# Altium PCB 2401_Test_Board_V1.1.PCBDOC (part 2 of 2)
Units mm, origin at the board's own origin, x right, y up, seen from the top; angles counter-clockwise.
Board outline 36.53 x 36.61 mm, 2 copper layers (Top Layer, Bottom Layer); 40 components, 34 nets, 129 pads, 21 vias.
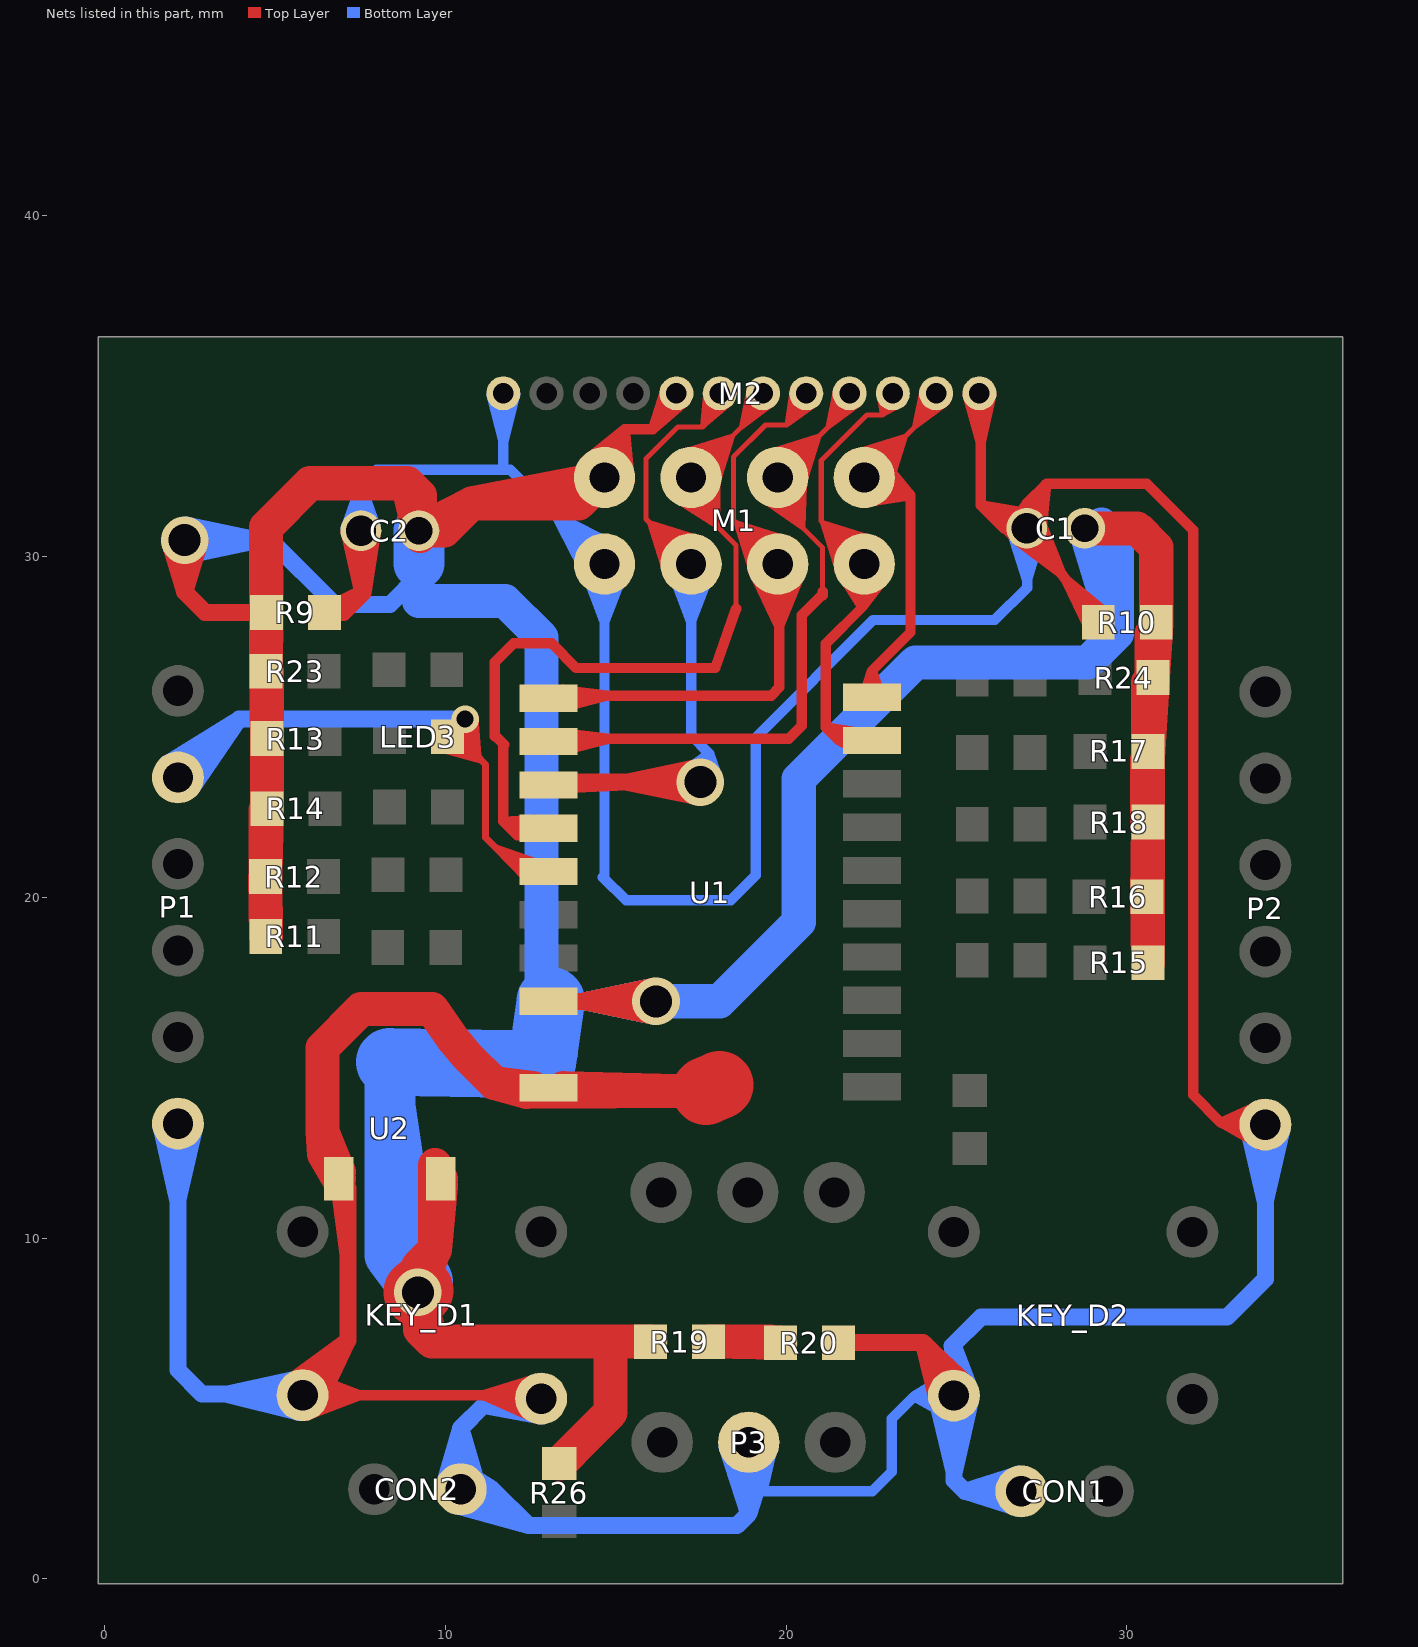
[diagram p2: the nets of this part, all layers, seen from the top]

## Via types
v1: diameter 1.397, hole 0.94, Top Layer to Bottom Layer, 11 vias
v2: diameter 0.8, hole 0.5, Top Layer to Bottom Layer, 10 vias

## Nets (pads, with @x,y where several pads share a name; then routed paths per layer and width w, separated by ;. In a path a pad name is that pad's centre, name@x,y a point inside that pad or via, vN(x,y) a via of type N, cw(c..) or ccw(c..) an arc to the next point about the centre after c; other vN are vias at no path point) (continued)
$$$32: LED3.1 P1.5 U1.15 | length 37.4
  Top Layer w0.2: LED3.1@9.901,24.335 11.07,24.008 ; LED3.1@9.971,24.524 11.07,24.008 ; LED3.1@10.061,24.683 11.07,24.008 ; LED3.1@10.061,24.708 10.071,24.718 10.36,24.718 11.18,23.898 11.18,21.748 12.17,20.758 U1.15@13.02,20.758 ; LED3.1@10.174,24.826 11.07,24.008 ; LED3.1@10.313,25.092 10.963,24.144 ; LED3.1@10.321,24.963 11.07,24.008 ; v2(10.58,25.228) 10.963,24.144 ; v2@10.873,25.29 10.963,24.144 ; U1.15@12.38,20.525 11.453,21.475 ; U1.15@12.57,20.758 11.453,21.475 ; U1.15@12.702,21.027 11.453,21.475
  Top Layer w0.5: LED3.1@10.061,24.708 v2(10.58,25.228) LED3.1@10.061,24.733
  Bottom Layer w0.5: P1.5@1.837,23.923 3.94,25.228 ; P1.5@2.54,23.186 3.94,25.228 ; v2(10.58,25.228) 3.94,25.228 ; 3.94,25.228 P1.5@2.15,23.518 2.23,23.518 3.94,25.228
$$$36: R19.1 R20.2 | length 3.9
  Top Layer w1: R20.2@19.54,6.958 R19.1@17.721,6.958 R20.2@19.829,6.928
CE: M1.3 M2.6 U1.13 | length 67.9
  Top Layer w0.15: M1.3@16.504,29.351 15.992,30.996 ; M1.3@16.648,29.403 15.992,30.996 ; M1.3@16.787,29.468 15.992,30.996 ; M1.3@16.918,29.543 15.992,30.996 ; M1.3@17.041,29.63 15.992,30.996 ; M1.3@17.156,29.726 15.992,30.996 ; M1.3@17.262,29.832 15.992,30.996 ; M1.3@17.358,29.947 15.992,30.996 ; M1.3@17.445,30.07 15.992,30.996 ; M1.3@17.52,30.201 15.992,30.996 ; M1.3@17.585,30.34 15.992,30.996 ; M1.3@17.637,30.484 15.992,30.996 ; M2.6@17.642,34.907 17.54,33.798 ; M2.6@17.792,34.883 17.54,33.798 ; M2.6@17.936,34.839 17.54,33.798 ; M2.6@18.158,34.725 17.54,33.798 ; M2.6@18.277,34.633 17.54,33.798 ; M2.6@18.384,34.525 17.54,33.798 ; 15.992,30.996 M1.3@17.21,29.778 15.89,31.098 15.89,32.868 16.82,33.798 17.54,33.798 ; 17.54,33.798 M2.6@18.05,34.788 18.01,34.748 18.01,34.268 17.54,33.798
  Top Layer w0.5: U1.13@13.02,23.298 13.1,23.378 v1(17.48,23.378) 15.282,23.378 ; U1.13@13.47,23.298 15.373,23.378 ; v1@17.434,22.932 15.282,23.378 ; v1@17.434,23.824 15.282,23.378
  Bottom Layer w0.305: M1.3@16.611,29.667 17.21,28.102 ; M1.3@16.906,29.75 17.21,28.102 ; v1@17.034,23.693 17.74,24.218 ; M1.3@17.21,29.778 17.21,24.748 17.74,24.218 ; v1@17.261,23.48 17.74,24.218 ; M1.3@17.514,29.75 17.21,28.102 ; v1@17.718,23.339 17.74,24.218 ; M1.3@17.809,29.667 17.21,28.102 ; v1@18.026,23.387 17.74,24.218 ; 17.74,24.218 v1(17.48,23.378) 17.56,23.378 17.74,23.558 17.74,24.218
CSN: M1.7 M2.7 U1.14 | length 78.9
  Top Layer w0.15: M1.7@16.604,31.758 17.981,30.877 ; M1.7@16.693,31.884 17.981,30.877 ; M1.7@16.783,33.024 18.428,33.536 ; M1.7@16.793,31.999 17.981,30.877 ; M1.7@16.835,32.88 18.428,33.536 ; M1.7@16.9,32.741 18.428,33.536 ; M1.7@16.902,32.104 17.981,30.877 ; M1.7@16.975,32.61 18.428,33.536 ; M1.7@17.019,32.198 17.981,30.877 ; M1.7@17.062,32.487 18.428,33.536 ; M1.7@17.145,32.281 17.981,30.877 ; M1.7@17.158,32.372 18.428,33.536 ; M1.7@17.264,32.266 18.428,33.536 ; M1.7@17.277,32.352 17.981,30.877 ; M1.7@17.379,32.17 18.428,33.536 ; M1.7@17.415,32.41 17.981,30.877 ; M1.7@17.502,32.083 18.428,33.536 ; M1.7@17.559,32.456 17.981,30.877 ; M1.7@17.633,32.008 18.428,33.536 ; M1.7@17.707,32.488 17.981,30.877 ; M1.7@17.772,31.943 18.428,33.536 ; M1.7@17.858,32.507 17.981,30.877 ; M1.7@17.916,31.891 18.428,33.536 ; M1.7@18.012,32.511 17.981,30.877 ; 18.53,28.468 18.53,30.328 17.21,31.648 M1.7@17.21,32.318 ; M2.7@18.926,34.948 18.685,33.793 ; M2.7@19.073,34.908 18.685,33.793 ; M2.7@19.211,34.85 18.685,33.793 ; M2.7@19.422,34.715 18.685,33.793 ; M2.7@19.533,34.614 18.685,33.793 ; M2.7@19.631,34.499 18.685,33.793 ; M1.7@17.21,32.318 17.981,30.877 ; M1.7@17.21,32.318 19.33,34.438 19.33,34.778 M2.7@19.32,34.788 18.685,33.793
  Top Layer w0.3: 11.73,24.478 11.7,24.448 11.7,22.228 ; U1.14@12.48,21.795 11.7,22.228 ; U1.14@12.591,22.277 11.7,22.228 ; U1.14@13.02,22.028 12.99,22.028 12.78,21.818 12.11,21.818 ; 11.7,22.228 U1.14@12.57,22.028 ; 11.7,22.228 12.11,21.818 ; 12.11,21.818 U1.14@12.57,22.028 ; 12.11,21.818 12.413,22.223 12.11,21.818 ; 12.11,21.818 12.614,21.782 12.11,21.818 ; 12.11,21.818 U1.14@12.57,22.028
  Top Layer w0.305: 11.73,24.478 11.49,24.718 11.45,24.718 11.45,26.9 12,27.45 13.118,27.45 13.84,26.728 17.92,26.728 18.53,28.468
GND: C1.2 C2.2 CON1.1 CON2.1 KEY_D1.1 KEY_D1.4 KEY_D2.1 M1.4 M2.1 M2.12 P1.1 P2.1 P3.2 R9.2 R10.2 R20.1 U1.20 U2.1 | length 369.3
  Top Layer w0.305: KEY_D1.1@5.838,5.084 7.486,5.388 ; KEY_D1.1@5.838,5.692 7.486,5.388 ; KEY_D1.1@5.921,4.789 7.486,5.388 ; KEY_D1.1@5.921,5.987 7.486,5.388 ; KEY_D1.4@12.664,4.696 11.128,5.388 ; KEY_D1.4@12.736,5.893 11.128,5.388 ; KEY_D1.4@12.764,4.987 11.128,5.388 ; KEY_D1.4@12.8,5.593 11.128,5.388 ; U1.20@13.02,14.408 18.04,14.488 ; U1.20@13.47,14.408 14.784,14.436 ; U1.20@13.488,14.655 14.784,14.436 ; U1.20@13.499,14.162 14.784,14.436 ; KEY_D2.1@24.92,5.378 KEY_D2.1@24.92,5.488 ; M2.12@25.326,34.736 25.71,33.372 ; M2.12@26.016,34.755 25.71,33.372 ; C1.2@26.684,31.071 27.64,32.138 ; C1.2@26.744,30.511 28.071,29.501 ; C1.2@26.802,30.462 25.71,31.508 ; C1.2@27.2,31.253 25.71,31.508 ; C1.2@27.449,31.049 28.071,29.501 ; C1.2@27.493,30.713 27.64,32.138 ; R10.2@28.878,27.92 28.221,29.304 ; R10.2@29.159,28.068 27.079,30.809 C1.2@27.06,30.828 ; R10.2@29.159,28.093 28.221,29.304 ; R10.2@29.397,28.323 28.221,29.304 ; P2.1@33.89,12.743 32.76,13.388 ; P2.1@33.945,13.927 32.76,13.388 ; P2.1@34.01,13.027 32.76,13.388 ; P2.1@34.038,13.632 32.76,13.388 ; 7.486,5.388 KEY_D1.1@5.81,5.388 12.71,5.388 KEY_D1.4@12.81,5.288 11.128,5.388 ; 25.71,31.508 C1.2@27.06,30.828 ; 25.71,31.508 25.71,34.748 M2.12@25.67,34.788 25.71,33.372 ; 25.71,31.508 26.39,30.828 C1.2@27.06,30.828 ; C1.2@27.06,30.828 28.071,29.501 ; C1.2@27.06,30.828 27.06,31.558 ; C1.2@27.06,30.828 27.64,32.138 ; C1.2@27.06,30.828 27.06,31.558 ; 27.06,31.558 27.486,30.965 27.06,31.558 ; 27.06,31.558 26.634,30.965 27.06,31.558 ; 27.06,31.558 27.64,32.138 ; 27.64,32.138 30.58,32.138 31.95,30.768 31.95,14.198 32.76,13.388 ; 32.76,13.388 P2.1@34.06,13.328 34,13.388 32.76,13.388
  Top Layer w0.5: KEY_D1.1@5.458,5.76 7.14,6.998 ; KEY_D1.1@6.242,5.113 7.14,6.998 ; R9.2@6.451,28.383 7.58,28.928 ; U2.1@6.871,11.533 7.14,9.533 ; U2.1@6.871,11.736 7.14,11.467 7.14,6.998 ; C2.2@7.173,30.713 7.58,28.928 ; C2.2@7.869,30.736 7.58,28.928 ; R20.1@21.531,6.928 24.02,6.928 ; KEY_D2.1@24.445,5.187 24.02,6.928 ; KEY_D2.1@24.92,5.378 24.02,6.928 ; KEY_D2.1@24.92,5.488 24.92,6.028 24.02,6.928 ; KEY_D2.1@25.322,5.696 24.02,6.928 ; 7.01,28.358 R9.2@6.451,28.358 7.01,28.358 ; 7.01,28.358 7.58,28.928 ; 7.14,6.998 KEY_D1.1@5.81,5.388 5.81,5.668 7.14,6.998 ; 7.58,28.928 C2.2@7.52,30.758 7.58,30.698 7.58,28.928
  Top Layer w1: U2.1@6.871,11.736 6.434,12.464 ; U1.20@12.57,14.408 11.43,14.548 ; U1.20@13.47,14.408 16.874,14.314 ; 17.65,14.318 12.38,14.288 11.43,14.548 ; 6.39,13.137 U2.1@6.871,11.939 ; 6.39,13.137 6.39,15.578 7.53,16.718 9.61,16.718 10.27,15.778 10.65,15.328 11.43,14.548 ; 6.39,13.137 6.434,12.464 ; 6.434,12.464 U2.1@6.871,11.939 ; 6.434,12.464 U2.1@6.871,11.939
  Top Layer w2: 17.65,14.318 18.04,14.488
  Bottom Layer w0.305: C2.2@7.079,30.833 7.52,32.088 ; C2.2@7.52,30.758 7.52,32.088 ; C2.2@7.961,30.833 7.52,32.088 ; M2.1@11.355,34.745 11.7,33.374 M2.1@12.045,34.745 ; M2.1@11.7,34.788 11.7,32.548 ; M1.4@14.071,29.667 14.67,28.102 ; M1.4@14.178,29.418 13.261,31.187 ; M1.4@14.366,29.75 14.67,28.102 ; M1.4@14.439,29.58 13.261,31.187 ; M1.4@14.868,30.009 13.261,31.187 ; M1.4@14.974,29.75 14.67,28.102 ; M1.4@15.03,30.27 13.261,31.187 ; M1.4@15.269,29.667 14.67,28.102 ; P3.2@18.255,3.63 19.31,2.568 ; P3.2@18.497,3.825 19.31,2.568 ; P3.2@19.339,4.065 19.31,2.568 ; P3.2@19.647,4.027 19.31,2.568 ; KEY_D2.1@24.746,5.962 23.75,5.348 ; KEY_D2.1@24.776,4.786 23.75,5.348 ; KEY_D2.1@24.873,5.679 23.75,5.348 ; KEY_D2.1@24.888,5.075 23.75,5.348 ; C1.2@26.618,30.759 27.07,29.314 ; C1.2@27.503,30.765 27.07,29.314 ; 7.52,32.088 7.98,32.548 11.7,32.548 ; 11.7,32.548 11.9,32.548 M1.4@14.67,29.778 ; 13.261,31.187 M1.4@14.67,29.778 ; 14.67,28.102 M1.4@14.67,29.778 ; M1.4@14.67,29.778 14.67,20.638 14.62,20.588 15.3,19.908 18.37,19.908 19.11,20.648 19.11,24.688 22.56,28.138 26.12,28.138 27.07,29.088 27.07,30.818 C1.2@27.06,30.828 27.07,29.314 ; P3.2@18.9,4.008 18.91,2.968 ; P3.2@18.9,4.008 19.31,2.568 ; P3.2@18.9,4.008 18.91,2.968 ; 18.91,2.968 18.468,3.91 18.91,2.968 ; 18.91,2.968 19.334,3.918 18.91,2.968 ; 18.91,2.968 18.205,3.733 18.91,2.968 ; 18.91,2.968 19.6,3.746 18.91,2.968 ; 18.91,2.968 19.31,2.568 ; 19.31,2.568 22.53,2.568 23.1,3.138 23.1,4.698 23.75,5.348 ; 23.75,5.348 KEY_D2.1@24.92,5.378 24.89,5.348 23.75,5.348
  Bottom Layer w0.5: P1.1@1.641,13.3 2.15,11.096 P1.1@2.659,13.3 ; P1.1@2.15,13.358 2.15,6.128 2.86,5.418 5.78,5.418 KEY_D1.1@5.81,5.388 3.548,5.418 ; KEY_D1.1@5.745,4.88 3.548,5.418 ; KEY_D1.1@5.759,5.897 3.548,5.418 ; CON2.1@9.943,2.701 10.45,4.418 ; CON2.1@10.261,2.152 12.45,1.558 ; CON2.1@10.741,3.049 12.45,1.558 ; CON2.1@10.957,2.701 10.45,4.418 ; KEY_D1.4@12.674,5.782 11.12,5.088 ; KEY_D1.4@12.793,4.776 11.12,5.088 ; P3.2@18.258,3.907 18.9,1.908 ; P3.2@18.9,4.008 18.9,1.908 ; P3.2@19.542,3.907 18.9,1.908 ; KEY_D2.1@24.412,5.318 24.93,3.116 ; KEY_D2.1@24.417,5.472 24.92,6.778 ; KEY_D2.1@25.423,5.472 24.92,6.778 ; KEY_D2.1@25.429,5.322 24.93,3.116 ; CON1.1@26.821,2.062 25.25,2.568 ; CON1.1@26.821,3.074 25.25,2.568 ; CON1.1@26.9,2.568 25.25,2.568 ; P2.1@33.551,13.27 34.06,11.066 P2.1@34.569,13.27 ; P2.1@34.06,13.328 34.06,8.798 32.94,7.678 25.72,7.678 24.87,6.828 24.92,6.778 ; CON2.1@10.45,2.628 11.37,2.638 ; CON2.1@10.45,2.628 12.45,1.558 ; CON2.1@10.45,2.628 11.36,2.628 ; CON2.1@10.45,2.628 11.37,2.638 ; CON2.1@10.45,2.628 10.45,4.418 ; CON2.1@10.45,2.628 11.36,2.628 ; 10.45,4.418 11.12,5.088 ; 11.12,5.088 KEY_D1.4@12.81,5.288 12.81,5.088 11.12,5.088 ; 11.36,2.628 10.594,2.137 11.36,2.628 ; 11.36,2.628 10.594,3.119 11.36,2.628 ; 11.36,2.628 11.37,2.638 ; 11.37,2.638 10.598,2.138 11.37,2.638 ; 11.37,2.638 10.587,3.121 11.37,2.638 ; 11.37,2.638 12.45,1.558 ; 12.45,1.558 18.55,1.558 18.9,1.908 ; KEY_D2.1@24.92,5.378 24.93,3.116 ; KEY_D2.1@24.92,5.378 24.92,6.778 ; KEY_D2.1@24.92,5.378 24.93,5.368 24.93,2.888 25.25,2.568 ; KEY_D2.1@24.92,5.378 24.92,6.778
IRQ: M1.5 M2.11 U1.10 | length 49.1
  Top Layer w0.15: M1.5@21.863,33.024 23.508,33.536 ; M1.5@21.915,32.88 23.508,33.536 ; M1.5@21.98,32.741 23.508,33.536 ; M1.5@22.055,32.61 23.508,33.536 ; M1.5@22.142,32.487 23.508,33.536 ; M1.5@22.238,32.372 23.508,33.536 ; M1.5@22.29,32.318 24.43,34.458 24.43,34.758 M2.11@24.4,34.788 23.767,33.795 ; M1.5@22.344,32.266 23.508,33.536 ; M1.5@22.459,32.17 23.508,33.536 ; M1.5@22.582,32.083 23.508,33.536 ; M1.5@22.713,32.008 23.508,33.536 ; M1.5@22.852,31.943 23.508,33.536 ; M1.5@22.996,31.891 23.508,33.536 ; M2.11@24.006,34.948 23.767,33.795 ; M2.11@24.152,34.908 23.767,33.795 ; M2.11@24.291,34.85 23.767,33.795 ; M2.11@24.502,34.715 23.767,33.795 ; M2.11@24.613,34.614 23.767,33.795 ; M2.11@24.711,34.499 23.767,33.795
  Top Layer w0.3: M1.5@22.196,31.878 23.65,31.798 ; M1.5@22.212,31.572 23.65,31.798 ; U1.10@22.273,25.908 22.52,26.648 ; M1.5@22.514,32.708 23.65,31.798 ; U1.10@22.52,25.868 22.52,26.648 ; M1.5@22.729,32.926 23.65,31.798 ; U1.10@22.767,25.908 22.52,26.648 ; 22.52,26.648 23.65,27.778 23.65,31.798 ; 23.65,31.798 M1.5@22.29,32.318 22.3,32.328 23.12,32.328 23.65,31.798
MISO: M1.1 M2.10 U1.9 | length 51.4
  Top Layer w0.15: M1.1@21.584,29.351 21.072,30.996 ; M1.1@21.728,29.403 21.072,30.996 ; M1.1@21.867,29.468 21.072,30.996 ; M1.1@21.998,29.543 21.072,30.996 ; M1.1@22.121,29.63 21.072,30.996 ; M1.1@22.236,29.726 21.072,30.996 ; M1.1@22.29,29.778 21.03,31.038 21.03,32.818 22.37,34.158 22.83,34.158 ; M1.1@22.342,29.832 21.072,30.996 ; M1.1@22.438,29.947 21.072,30.996 ; M1.1@22.525,30.07 21.072,30.996 ; M1.1@22.6,30.201 21.072,30.996 ; M1.1@22.665,30.34 21.072,30.996 ; M2.10@22.709,34.845 22.83,34.158 ; M1.1@22.717,30.484 21.072,30.996 ; M2.10@22.863,34.855 22.83,34.158 ; M2.10@23.013,34.831 22.83,34.158 ; M2.10@23.238,34.724 22.83,34.158 ; M2.10@23.35,34.623 22.83,34.158 ; M2.10@23.44,34.497 22.83,34.158 ; 22.83,34.158 M2.10@23.13,34.788 23.12,34.778 23.12,34.448 22.83,34.158
  Top Layer w0.3: M1.1@21.566,29.584 22.24,28.518 ; M1.1@21.844,29.715 22.24,28.518 ; U1.9@21.943,24.382 21.16,24.988 ; U1.9@22.139,24.838 21.16,24.988 ; U1.9@22.52,24.598 21.55,24.598 ; M1.1@22.729,29.68 22.24,28.518 ; M1.1@22.997,29.527 22.24,28.518 ; 21.16,24.988 U1.9@22.07,24.598 ; 21.16,24.988 21.16,27.438 22.24,28.518 ; 21.16,24.988 21.55,24.598 ; 21.55,24.598 U1.9@22.07,24.598 ; 21.55,24.598 22.01,24.841 21.55,24.598 ; 21.55,24.598 22.01,24.355 21.55,24.598 ; 21.55,24.598 U1.9@22.07,24.598 ; 22.24,28.518 M1.1@22.29,29.778 22.24,29.728 22.24,28.518
MOSI: M1.6 M2.9 U1.12 | length 73.6
  Top Layer w0.15: M1.6@19.127,31.777 20.488,30.84 ; M1.6@19.22,31.899 20.488,30.84 ; M1.6@19.324,32.012 20.488,30.84 ; M1.6@19.323,33.024 20.968,33.536 ; M1.6@19.375,32.88 20.968,33.536 ; M1.6@19.436,32.113 20.488,30.84 ; M1.6@19.44,32.741 20.968,33.536 ; M1.6@19.515,32.61 20.968,33.536 ; M1.6@19.556,32.204 20.488,30.84 ; M1.6@19.602,32.487 20.968,33.536 ; M1.6@19.684,32.283 20.488,30.84 ; M1.6@19.698,32.372 20.968,33.536 ; M1.6@19.804,32.266 20.968,33.536 ; M1.6@19.818,32.35 20.488,30.84 ; M1.6@19.919,32.17 20.968,33.536 ; M1.6@19.958,32.405 20.488,30.84 ; M1.6@20.042,32.083 20.968,33.536 ; M1.6@20.102,32.446 20.488,30.84 ; M1.6@20.173,32.008 20.968,33.536 ; M1.6@20.251,32.475 20.488,30.84 ; M1.6@20.312,31.943 20.968,33.536 ; M1.6@20.403,32.49 20.488,30.84 ; M1.6@20.456,31.891 20.968,33.536 ; M1.6@20.557,32.49 20.488,30.84 ; 21.07,28.968 21.07,30.258 19.72,31.608 19.72,32.288 M1.6@19.75,32.318 ; M2.9@21.467,34.949 21.22,33.788 ; M2.9@21.613,34.908 21.22,33.788 ; M2.9@21.751,34.85 21.22,33.788 ; M2.9@21.962,34.715 21.22,33.788 ; M2.9@22.073,34.614 21.22,33.788 ; M2.9@22.171,34.499 21.22,33.788 ; M1.6@19.75,32.318 20.488,30.84 ; M1.6@19.75,32.318 21.83,34.398 21.83,34.848 21.86,34.818 M2.9@21.86,34.788 21.22,33.788
  Top Layer w0.305: U1.12@13.02,24.568 13.1,24.648 20.08,24.648 20.46,25.028 20.46,28.278 21.05,28.868 21.07,28.868 21.07,28.968 ; U1.12@13.47,24.568 14.788,24.648 ; U1.12@13.478,24.815 14.788,24.648 ; U1.12@13.508,24.323 14.788,24.648
SCK: M1.2 M2.8 U1.11 | length 58.6
  Top Layer w0.15: M1.2@19.044,29.351 18.532,30.996 ; M1.2@19.188,29.403 18.532,30.996 ; M1.2@19.327,29.468 18.532,30.996 ; M1.2@19.458,29.543 18.532,30.996 ; M1.2@19.581,29.63 18.532,30.996 ; M1.2@19.696,29.726 18.532,30.996 ; M1.2@19.78,29.688 19.78,29.748 M1.2@19.75,29.778 18.45,31.078 18.45,32.918 19.39,33.858 20.01,33.858 20.5,34.348 20.5,34.698 M2.8@20.59,34.788 20.019,33.867 ; M1.2@19.802,29.832 18.532,30.996 ; M1.2@19.898,29.947 18.532,30.996 ; M1.2@19.985,30.07 18.532,30.996 ; M1.2@20.06,30.201 18.532,30.996 ; M1.2@20.125,30.34 18.532,30.996 ; M1.2@20.177,30.484 18.532,30.996 ; M2.8@20.192,34.937 20.019,33.867 ; M2.8@20.34,34.902 20.019,33.867 ; M2.8@20.48,34.848 20.019,33.867 ; M2.8@20.692,34.716 20.019,33.867 ; M2.8@20.803,34.615 20.019,33.867 ; M2.8@20.9,34.498 20.019,33.867
  Top Layer w0.305: U1.11@13.02,25.838 13.1,25.918 19.56,25.918 19.8,26.158 19.8,29.668 M1.2@19.78,29.688 ; U1.11@13.47,25.838 14.788,25.918 ; U1.11@13.478,26.085 14.788,25.918 ; U1.11@13.508,25.593 14.788,25.918 ; M1.2@19.023,29.604 19.8,27.963 ; M1.2@19.312,29.712 19.8,27.963 ; M1.2@19.75,29.778 19.8,27.963 ; M1.2@20.191,29.736 19.8,27.963 ; M1.2@20.486,29.644 19.8,27.963
VCC: C1.1 C2.1 M1.8 M2.5 R9.1 R10.1 R11.2 R12.2 R13.2 R14.2 R15.1 R16.1 R17.1 R18.1 R19.2 R23.2 R24.1 R26.1 U1.18 U2.3 | length 275.7
  Top Layer w0.305: M1.8@14.07,32.764 15.26,33.738 ; M1.8@14.29,32.545 15.26,33.738 ; M1.8@15.099,32.209 15.26,33.738 ; M1.8@15.409,32.208 15.26,33.738 ; M2.5@16.466,34.937 16.09,33.738 ; M2.5@17.041,34.559 16.09,33.738 ; R16.1@30.591,20.018 30.621,19.988 R16.1@30.621,19.858 ; R18.1@30.591,22.078 30.591,22.178 R18.1@30.621,22.208 ; R17.1@30.621,24.078 R17.1@30.621,24.278 ; R24.1@30.715,26.403 R24.1@30.761,26.448 ; 15.26,33.738 M1.8@14.67,32.318 14.67,33.148 15.26,33.738 ; 15.26,33.738 16.09,33.738 ; 16.09,33.738 M2.5@16.78,34.788 16.79,34.778 16.79,34.438 16.09,33.738
  Top Layer w0.5: v1@1.906,30.412 2.35,28.958 ; v1(2.35,30.478) 2.35,28.958 ; v1@2.794,30.412 2.35,28.958 ; R9.1@4.749,28.358 2.95,28.358 2.35,28.958 ; U1.18@13.02,16.948 v1(16.18,16.948) ; U1.18@13.47,16.948 15.37,16.948 ; v1@16.056,16.517 15.37,16.948 ; v1@16.056,17.379 15.37,16.948 ; 13.982,16.948 16.134,17.394 13.982,16.948 ; 13.982,16.948 16.134,16.502 13.982,16.948
  Top Layer w1: 4.739,30.136 4.739,26.653 4.749,28.333 R23.2@4.739,26.628 ; R9.1@4.749,28.383 4.739,30.858 ; U2.3@9.869,11.533 9.689,9.657 ; U2.3@9.869,11.736 9.689,12.136 9.689,9.657 ; R26.1@13.34,3.379 14.85,4.889 ; R26.1@13.365,3.379 14.85,4.889 ; R19.2@16.019,6.958 14.85,6.958 ; C1.1@28.76,30.828 30.3,30.828 30.861,30.267 ; R10.1@30.861,28.093 30.861,30.267 ; R12.2@4.709,20.598 4.729,18.873 4.719,20.583 R11.2@4.729,18.848 R12.2@4.709,20.598 ; R12.2@4.709,20.598 R12.2@4.719,20.608 ; R12.2@4.719,20.608 4.759,22.573 4.719,20.633 R14.2@4.719,22.558 ; R12.2@4.719,20.608 R14.2@4.719,22.558 ; R14.2@4.719,22.558 R14.2@4.759,22.598 ; R23.2@4.739,26.628 R23.2@4.759,26.608 ; R23.2@4.739,26.628 4.739,30.858 ; 4.739,30.858 6.03,32.149 8.89,32.149 ; R14.2@4.759,22.598 4.759,24.633 4.759,22.623 R13.2@4.759,24.658 ; R14.2@4.759,22.598 R13.2@4.759,24.658 ; R13.2@4.759,24.658 4.739,26.603 4.759,24.683 R23.2@4.759,26.608 ; R13.2@4.759,24.658 R23.2@4.759,26.608 ; 8.89,32.149 C2.1@9.22,30.758 ; 8.89,32.149 9.251,31.788 ; v1(9.19,8.408) 9.25,7.318 ; v1(9.19,8.408) 9.689,9.657 ; v1(9.19,8.408) 9.25,7.318 ; v1(9.19,8.408) 9.61,6.958 ; C2.1@9.22,30.758 9.251,31.788 ; C2.1@9.22,30.758 9.97,30.768 ; C2.1@9.22,30.758 10.76,31.558 ; C2.1@9.22,30.758 9.251,31.788 ; C2.1@9.22,30.758 9.97,30.768 ; C2.1@9.22,30.758 9.251,30.727 9.251,30.608 9.251,31.788 ; C2.1@9.22,30.758 9.23,30.768 9.97,30.768 ; 9.25,7.318 9.61,6.958 ; 9.25,7.318 9.25,8.446 9.239,8.457 9.239,9.109 9.19,9.158 9.689,9.657 ; 9.61,6.958 14.85,6.958 ; 9.97,30.768 10.76,31.558 ; 10.76,31.558 M1.8@14.67,32.318 13.91,31.558 10.76,31.558 ; 14.85,4.889 14.85,6.958 ; R18.1@30.591,22.078 30.621,24.253 30.621,22.233 R17.1@30.591,24.048 ; R18.1@30.591,22.078 R17.1@30.591,24.048 ; R18.1@30.591,22.078 R18.1@30.621,22.048 ; R17.1@30.591,24.048 R17.1@30.621,24.078 ; R16.1@30.621,19.858 30.621,18.103 30.591,19.993 R15.1@30.621,18.078 R16.1@30.621,19.858 ; R16.1@30.621,19.858 30.621,22.183 30.591,20.043 R18.1@30.621,22.048 ; R16.1@30.621,19.858 R18.1@30.621,22.048 ; R17.1@30.621,24.078 30.761,26.423 30.621,24.303 R24.1@30.621,26.308 ; R17.1@30.621,24.078 R24.1@30.621,26.308 ; R24.1@30.621,26.308 R24.1@30.715,26.403 ; R24.1@30.715,26.403 30.861,28.043 30.761,26.473 R10.1@30.715,27.733 ; R24.1@30.715,26.403 R10.1@30.715,27.733 ; R10.1@30.715,27.733 30.74,27.758 R10.1@30.861,28.068 30.861,30.267
  Top Layer w2: v1(9.19,8.408) v1@9.239,8.457
  Bottom Layer w0.305: v1(9.19,8.408) 9.22,8.438 v1@9.22,8.658
  Bottom Layer w0.5: v1(2.35,30.478) 4.87,30.478 6.76,28.588 8.37,28.588 9.22,29.438 9.22,29.798 ; v1@2.396,30.032 4.548,30.478 v1@2.396,30.924 ; C2.1@8.871,30.728 9.22,28.698 ; C2.1@9.22,30.758 9.22,28.698 ; C2.1@9.569,30.728 9.22,28.698 ; 13.09,16.948 v1(16.18,16.948) ; v1@16.134,16.502 13.982,16.948 v1@16.134,17.394
  Bottom Layer w1: 9.22,28.698 11.75,28.698 12.824,27.624 12.824,15.088 ; v1(16.18,16.948) 18.04,16.948 20.37,19.278 20.37,23.468 23.79,26.888 28.85,26.888 29.7,27.738 ; C1.1@28.76,30.828 29.7,30.488 ; C1.1@28.76,30.828 29.7,27.738 ; C1.1@28.76,30.828 29.7,30.488 ; C1.1@28.76,30.828 29.14,30.828 29.25,30.938 29.7,30.488 ; 29.7,27.738 29.7,30.488
  Bottom Layer w1.5: 8.37,13.922 v1(9.19,8.408) ; 8.37,15.168 8.37,9.498 ; v1@9.22,8.698 8.42,9.498 ; 9.22,29.798 C2.1@9.22,30.758 ; 8.37,9.498 v1(9.19,8.408) ; 8.37,9.498 v1(9.19,8.408) ; 8.37,9.498 8.42,9.498 ; 8.42,9.498 v1(9.19,8.408) ; 8.42,9.498 v1(9.19,8.408)
  Bottom Layer w2: 8.37,15.168 12.824,15.088 13.09,16.948 ; v1@9.22,8.658 v1@9.22,8.698
pads on no net: KEY_D1.3 KEY_D2.2 KEY_D2.4 M2.2 M2.3 M2.4 S1.3
copper on no net: | length 27.4
  Top Layer w0.254: 3.559,2.068 ccw(c2.47,2.068) 3.559,2.068 ; 3.559,33.668 ccw(c2.47,33.668) 3.559,33.668 ; 34.639,2.268 ccw(c33.55,2.268) 34.639,2.268 ; 34.749,33.708 ccw(c33.66,33.708) 34.749,33.708

## Polygon pours and split planes (outlines as drawn)
GND on Top Layer "Top Layer-GND" (solid, remove dead copper, pour order 0): -0.08,33.958 -0.087,34.106 -0.084,34.254 -0.071,34.401 -0.047,34.547 -0.013,34.691 0.03,34.833 0.084,34.971 0.147,35.104 0.219,35.234 0.3,35.357 0.39,35.475 0.487,35.587 0.592,35.691 0.704,35.788 0.823,35.876 0.947,35.956 1.077,36.028 1.211,36.09 1.349,36.142 1.491,36.185 1.635,36.218 1.782,36.241 1.929,36.253 2.077,36.255 2.21,36.248 34.21,36.248 34.312,36.272 34.417,36.288 34.522,36.297 34.627,36.299 34.732,36.294 34.837,36.281 34.94,36.261 35.042,36.233 35.142,36.199 35.239,36.158 35.333,36.11 35.423,36.056 35.51,35.995 35.592,35.929 35.669,35.857 35.741,35.78 35.807,35.698 35.868,35.611 35.922,35.521 35.97,35.427 36.011,35.33 36.045,35.23 36.073,35.128 36.093,35.025 36.106,34.92 36.111,34.815 36.109,34.71 36.1,34.605 36.084,34.5 36.06,34.398 36.06,34.018 36.19,34.018 36.19,2.368 36.19,2.366 36.183,2.198 36.164,2.03 36.133,1.864 36.09,1.7 36.037,1.54 35.972,1.384 35.897,1.233 35.811,1.087 35.716,0.948 35.61,0.816 35.496,0.692 35.374,0.575 35.244,0.468 35.106,0.37 34.962,0.282 34.812,0.204 34.657,0.136 34.498,0.08 34.335,0.035 34.17,0.001 34.003,-0.021 33.834,-0.031 33.788,-0.032 2.72,-0.032 2.722,-0.032 2.552,-0.048 2.381,-0.052 2.21,-0.044 2.041,-0.025 1.873,0.007 1.708,0.05 1.546,0.104 1.388,0.17 1.235,0.246 1.088,0.333 0.948,0.43 0.814,0.537 0.689,0.652 0.571,0.776 0.463,0.908 0.364,1.048 0.275,1.193 0.196,1.345 0.129,1.502 0.072,1.663 0.026,1.827 -0.007,1.995 -0.029,2.164 -0.039,2.335 -0.038,2.505 -0.024,2.676 -0.02,2.705 -0.02,33.958
GND on Bottom Layer "Bottom Layer-GND" (solid, remove dead copper, pour order 2): -0.1,33.928 -0.107,34.076 -0.104,34.224 -0.091,34.371 -0.067,34.517 -0.033,34.661 0.01,34.803 0.064,34.941 0.127,35.074 0.199,35.204 0.28,35.327 0.37,35.445 0.467,35.557 0.572,35.661 0.684,35.758 0.803,35.846 0.927,35.926 1.057,35.998 1.191,36.06 1.329,36.112 1.471,36.155 1.615,36.188 1.762,36.211 1.909,36.223 2.057,36.225 2.19,36.218 34.19,36.218 34.292,36.242 34.397,36.258 34.502,36.267 34.607,36.269 34.712,36.264 34.817,36.251 34.92,36.231 35.022,36.203 35.122,36.169 35.219,36.128 35.313,36.08 35.403,36.026 35.49,35.965 35.572,35.899 35.649,35.827 35.721,35.75 35.787,35.668 35.848,35.581 35.902,35.491 35.95,35.397 35.991,35.3 36.025,35.2 36.053,35.098 36.073,34.995 36.086,34.89 36.091,34.785 36.089,34.68 36.08,34.575 36.064,34.47 36.04,34.368 36.04,33.988 36.17,33.988 36.17,2.338 36.17,2.336 36.163,2.168 36.144,2 36.113,1.834 36.07,1.67 36.017,1.51 35.952,1.354 35.877,1.203 35.791,1.057 35.696,0.918 35.59,0.786 35.476,0.662 35.354,0.545 35.224,0.438 35.086,0.34 34.942,0.252 34.792,0.174 34.637,0.106 34.478,0.05 34.315,0.005 34.15,-0.029 33.983,-0.051 33.814,-0.061 33.768,-0.062 2.7,-0.062 2.702,-0.062 2.532,-0.078 2.361,-0.082 2.19,-0.074 2.021,-0.055 1.853,-0.023 1.688,0.02 1.526,0.074 1.368,0.14 1.215,0.216 1.068,0.303 0.928,0.4 0.794,0.507 0.669,0.622 0.551,0.746 0.443,0.878 0.344,1.018 0.255,1.163 0.176,1.315 0.109,1.472 0.052,1.633 0.006,1.797 -0.027,1.965 -0.049,2.134 -0.059,2.305 -0.058,2.475 -0.044,2.646 -0.04,2.675 -0.04,33.928

## Keep-outs
Keep-Out Layer:
  lines w0.254: 0,2.735 ccw(c2.427,2.425) 2.742,-0.002 ; 0,2.738 0,33.988 -0.06,33.988 cw(c2.053,34.165) 2.23,36.278 34.23,36.278 cw(c34.621,34.819) 36.08,34.428 ; 2.74,-0.002 33.81,-0.002 ; 33.808,-0.002 ccw(c33.791,2.417) 36.21,2.396 ; 36.08,34.428 36.08,34.048 36.21,34.048 36.21,2.398

## Silkscreen, mask and mechanical layers (free items; w line width, h text height)
Top Overlay:
  lines w0.2: 10.251,41.529 10.632,41.91 ; 10.632,35.56 10.632,41.91 ; 11.013,41.529 10.632,41.91 ; 23.535,33.477 28.437,33.477 28.437,36.906 28.361,36.982 25.694,36.982 ; 26.024,36.652 25.694,36.982 ; 26.05,37.338 25.694,36.982 ; -0.544,42.164 -0.544,44.45 37.175,44.45 37.175,42.164 -0.544,42.164 ; 10.632,34.036 26.507,34.036 26.507,35.687 10.632,35.687 10.632,34.036 ; 12.283,36.957 12.283,40.894 25.491,40.894 25.491,36.957 12.283,36.957
  text "GND" at 0.853,43.002 h0.8
  text "NC" at 3.859,43.002 h0.8
  text "NC" at 6.866,43.002 h0.8
  text "NC" at 9.872,43.002 h0.8
  text "3.3V" at 12.879,43.002 h0.8
  text "CE" at 15.885,43.002 h0.8
  text "CSN" at 18.892,43.002 h0.8
  text "SCK" at 21.898,43.002 h0.8
  text "MOSI" at 24.904,43.002 h0.8
  text "MISO" at 27.911,43.002 h0.8
  text "IRQ" at 30.917,43.002 h0.8
  text "GND" at 33.924,43.002 h0.8
  text "3.3V" at 13.045,39.497 h0.8
  text "CSN" at 16.22,39.497 h0.8
  text "MOSI" at 19.268,39.497 h0.8
  text "IRQ" at 22.697,39.497 h0.8
  text "GND" at 13.045,37.719 h0.8
  text "CE" at 16.474,37.592 h0.8
  text "SCK" at 19.268,37.592 h0.8
  text "MISO" at 22.697,37.592 h0.8
  text "1" at 9.489,34.392 h0.8
  text "12" at 26.761,34.392 h0.8
  text "P37" at -2.449,25.654 h0.8
  text "P36" at 36.789,25.603 h0.8
  text "P35" at 36.751,23.048 h0.8
  text "P16" at -2.576,22.987 h0.8
  text "P17" at -2.576,20.828 h0.8
  text "P34" at 36.713,20.493 h0.8
  text "P54" at -2.703,18.415 h0.8
  text "P33" at 36.751,17.937 h0.8
  text "P55" at -2.703,15.748 h0.8
  text "P32" at 36.751,15.382 h0.8
  text "GND" at 36.667,12.827 h0.8
  text "GND" at -2.703,12.7 h0.8
  text "OFF" at 14.823,8.001 h1
  text "ON" at 20.919,8.001 h1
  text "K1" at 4.18,7.088 h1.27
  text "K2" at 31.81,6.978 h1.27
  text "CDS" at 5.72,0.808 h1.27 r90
  text "+" at 31.21,0.438 h1.27
  text "-" at 25.83,0.228 h1.27
  text "G" at 18.31,0.168 h1.27
  text "R" at 15.99,0.118 h1.27
  text "T" at 21.03,-0.022 h1.27
  text "GND" at 25.872,-1.651 h0.8
  text "5V" at 29.174,-1.651 h0.8
  text "RXD" at 14.823,-1.905 h0.8
  text "GND" at 17.871,-1.905 h0.8
  text "TXD" at 20.919,-1.905 h0.8
Bottom Overlay:
  drawing of 396 lines, arcs and shapes, not listed
  text "Si4432" at 6.39,34.378 h0.77
  text "安信可安防" at 24.43,32.918 h0.77
  text "NRF24L01" at 15.66,27.128 h0.77
Drill Drawing:
  circle w0.254: c33.67,33.718 r1.089
  circle w0.254: c2.48,33.678 r1.089
  circle w0.254: c33.56,2.278 r1.089
  circle w0.254: c2.48,2.078 r1.089